# Allegro board Kati.brd
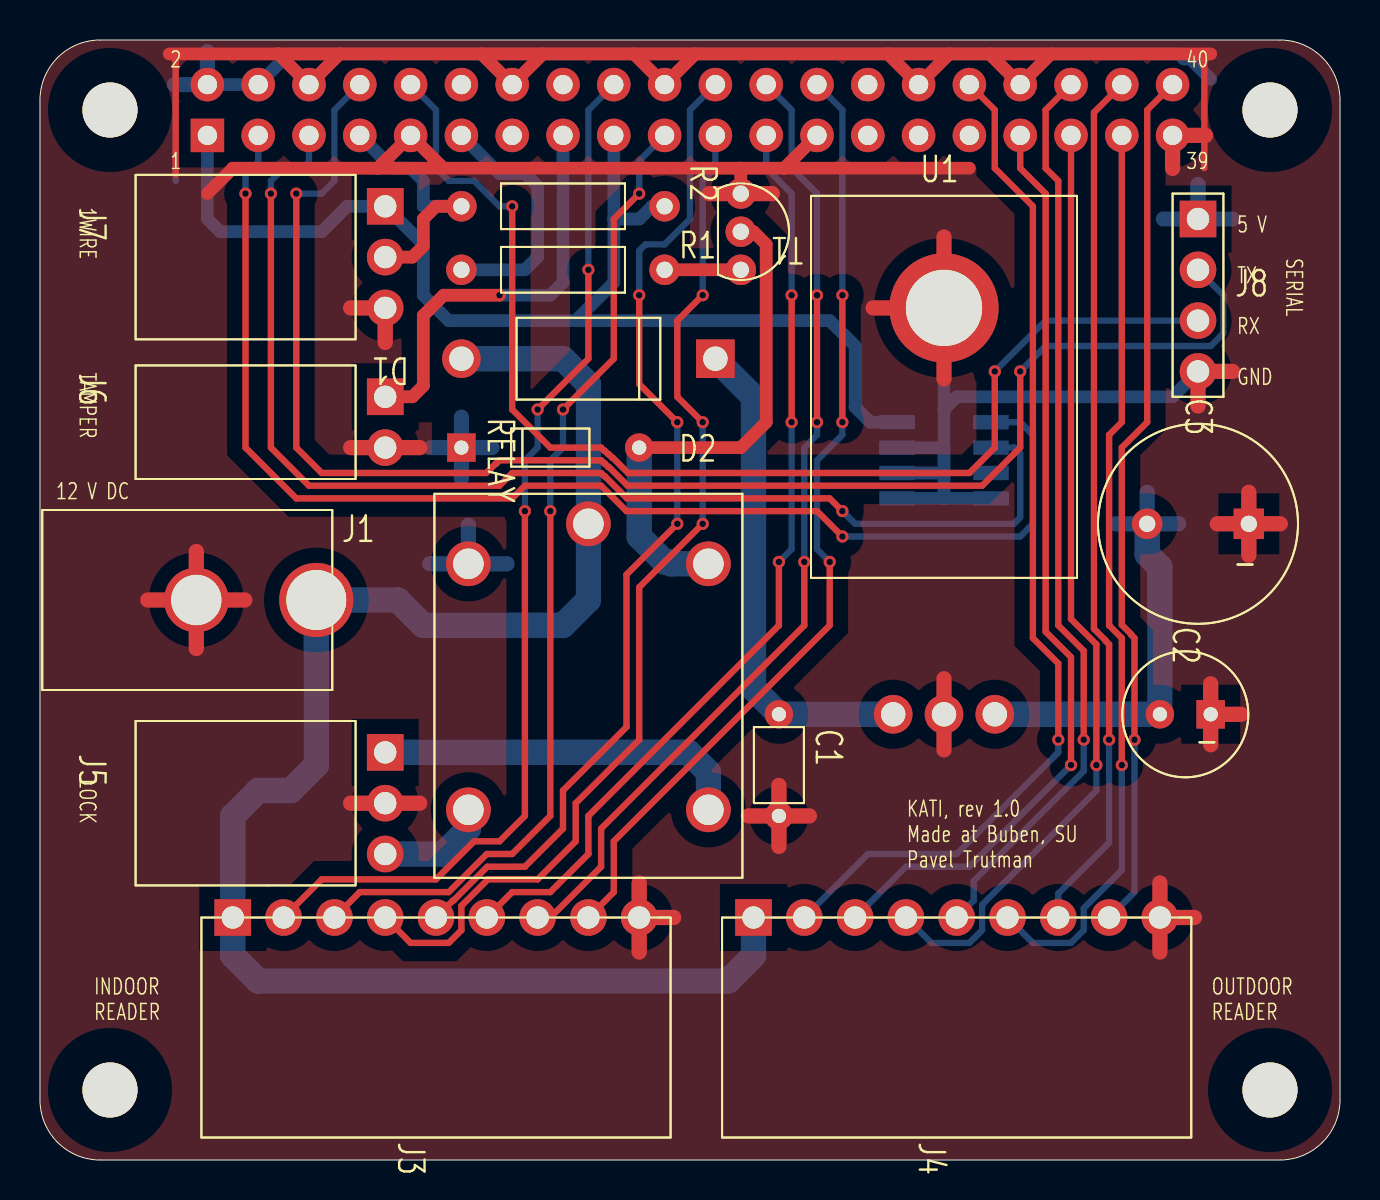
[diagram p0: board, top side]
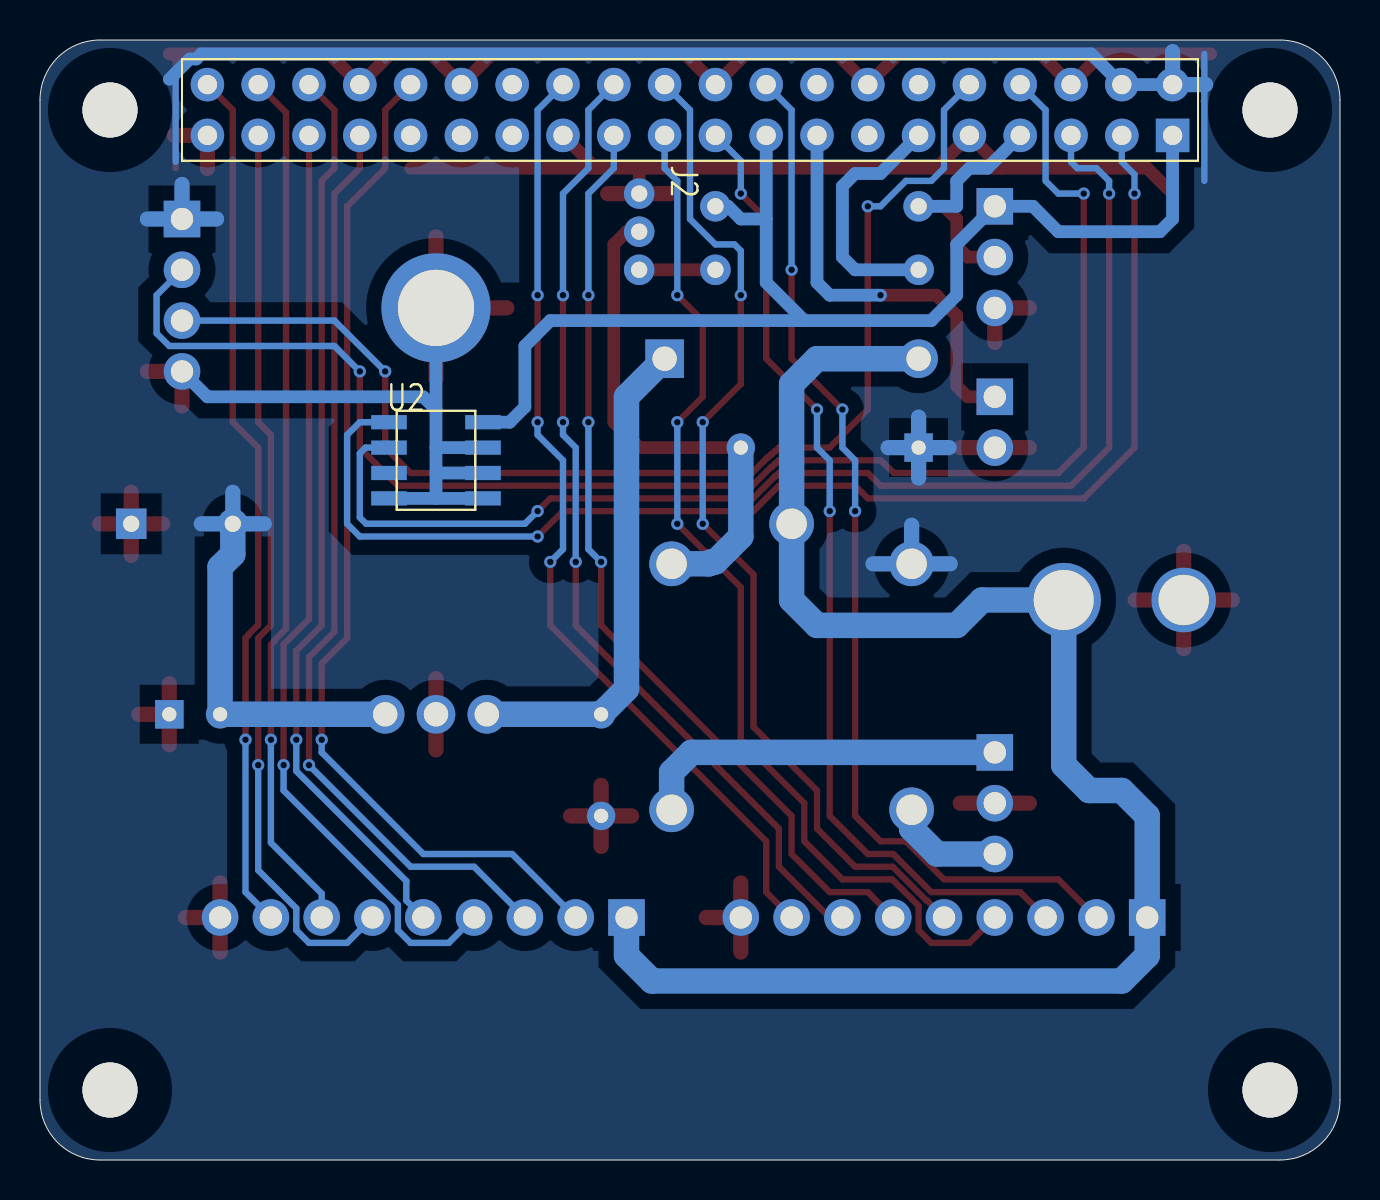
[diagram p1: board, bottom side, seen from below]

Outline 65 x 56 mm; copper layers: TOP, BOTTOM. Coordinates in mm from the lower left corner of the outline.
Outline path: 0,53 arc(0.88,55.12) 3,56 62,56 arc(64.12,55.12) 65,53 65,3 arc(64.12,0.88) 62,0 3,0 arc(0.88,0.88) 0,3 0,53

## Placement (name value [footprint] x y rotation side)
C1  100 nF  [KATI_C508]  36.95 19.74 270 top
C2  22 uF  [KATI_C63RAD]  57.27 22.29 0 top
C3  1000 uF  [KATI_C100RAD]  57.9 31.81 0 top
D1  BY299  [KATI_DO201]  27.42 40.06 180 top
D2  1N4148  [KATI_DO35]  25.52 35.62 0 top
J1  DC 7-16 V  [KATI_DS214B]  0.12 28 0 top
J2  Header 2x20 to RPi  [KATI_HEADER40_BOTTOM]  32.5 52.5 270 bottom
J3  Header to Indoor reader  [KATI_CONN9]  19.8 12.12 0 top
J4  Header to Outdoor header  [KATI_CONN9]  45.84 12.12 0 top
J5  Header to Lock  [KATI_CONN3]  17.26 17.84 270 top
J6  Header to Tampering contact  [KATI_CONN2]  17.26 36.89 270 top
J7  Header with 1WIRE  [KATI_CONN3]  17.26 45.14 270 top
J8  Header with serial port  [KATI_HEADER4]  57.9 43.24 0 top
NOREF  -  [unnamed]  3.5 52.5 0 top
NOREF#2  -  [unnamed]  61.5 3.5 0 top
NOREF#3  -  [unnamed]  61.5 52.5 0 top
NOREF#4  -  [unnamed]  3.5 3.5 0 top
R1  R  [KATI_RES]  26.15 44.51 0 top
R2  4k7  [KATI_RES]  26.15 47.69 0 top
RELAY  RAS-0515  [KATI_RELAY]  27.42 31.81 0 top
T1  BC369-030  [KATI_TO92]  35.04 47.69 0 top
U1  L4940V5  [KATI_TO220_HS]  45.2 42.61 0 top
U2  LM75A  [KATI_SO8]  45.2 34.98 180 bottom

## Library data of the parts
C1 = CAP NP
C2 C3 = CAP POL_0
D1 D2 = DIODE
J1 = CONNECTOR TWINAX-J
J2 = HEADER 20X2
J3 J4 = HEADER 9
J5 J7 = HEADER 3
J6 = HEADER 2
J8 = HEADER 4
R1 R2 = R
RELAY = RELAY SPDT
T1 = PNP BCE_0
U1 = 78XX/SM_5
U2 = TMP01_0

## Footprints (pads in the part's own frame, mm; a bottom-side part is the same pattern mirrored in y, then rotated)
KATI_C63RAD
  round 1.422 hole 0.711: 1(-1.27,0)
  rect 1.422x1.422 hole 0.711: 2(1.27,0)
KATI_C100RAD
  round 1.524 hole 0.813: 1(-2.54,0)
  rect 1.524x1.524 hole 0.813: 2(2.54,0)
KATI_C508
  round 1.422 hole 0.711: 1(-2.54,0) 2(2.54,0)
KATI_CONN2
  rect 1.829x1.829 hole 1.118: 1(-1.27,0)
  round 1.829 hole 1.118: 2(1.27,0)
KATI_CONN3
  rect 1.829x1.829 hole 1.118: 1(-2.54,0)
  round 1.829 hole 1.118: 2(0,0) 3(2.54,0)
KATI_CONN9
  rect 1.829x1.829 hole 1.118: 1(-10.16,0)
  round 1.829 hole 1.118: 2(-7.62,0) 3(-5.08,0) 4(-2.54,0) 5(0,0) 6(2.54,0) 7(5.08,0) 8(7.62,0) 9(10.16,0)
KATI_DO35
  rect 1.422x1.422 hole 0.711: 1(-4.445,0)
  round 1.422 hole 0.711: 2(4.445,0)
KATI_DO201
  rect 1.93x1.93 hole 1.219: 1(-6.35,0)
  round 1.93 hole 1.219: 2(6.35,0)
KATI_DS214B
  round 3.226 hole 2.515: 1(7.7,0)
  round 3.708 hole 2.997: 2(13.7,0)
KATI_HEADER4
  rect 1.829x1.829 hole 1.118: 1(0,3.81)
  round 1.829 hole 1.118: 2(0,1.27) 3(0,-1.27) 4(0,-3.81)
KATI_HEADER40_BOTTOM
  rect 1.676x1.676 hole 0.965: 1(1.27,24.13)
  round 1.676 hole 0.965: 2(-1.27,24.13) 3(1.27,21.59) 4(-1.27,21.59) 5(1.27,19.05) 6(-1.27,19.05) 7(1.27,16.51) 8(-1.27,16.51) 9(1.27,13.97) 10(-1.27,13.97) 11(1.27,11.43) 12(-1.27,11.43) 13(1.27,8.89) 14(-1.27,8.89) 15(1.27,6.35) 16(-1.27,6.35) 17(1.27,3.81) 18(-1.27,3.81) 19(1.27,1.27) 20(-1.27,1.27) 21(1.27,-1.27) 22(-1.27,-1.27) 23(1.27,-3.81) 24(-1.27,-3.81) 25(1.27,-6.35) 26(-1.27,-6.35) 27(1.27,-8.89) 28(-1.27,-8.89) 29(1.27,-11.43) 30(-1.27,-11.43) 31(1.27,-13.97) 32(-1.27,-13.97) 33(1.27,-16.51) 34(-1.27,-16.51) 35(1.27,-19.05) 36(-1.27,-19.05) 37(1.27,-21.59) 38(-1.27,-21.59) 39(1.27,-24.13) 40(-1.27,-24.13)
KATI_RELAY
  round 2.235 hole 1.524: 1(-6,-2) 2(6,-2) 3(0,0) 4(-6,-14.3) 5(6,-14.3)
KATI_RES
  round 1.524 hole 0.813: 1(-5.08,0) 2(5.08,0)
KATI_SO8
  rect 1.778x0.711 smd: 1(-2.349,1.905) 2(-2.349,0.635) 3(-2.349,-0.635) 4(-2.349,-1.905) 5(2.349,-1.905) 6(2.349,-0.635) 7(2.349,0.635) 8(2.349,1.905)
KATI_TO92
  round 1.524 hole 0.813: 1(0,0.635) 2(0,-1.27) 3(0,-3.175)
KATI_TO220_HS
  round 1.93 hole 1.219: 1(-2.54,-20.32) 2(0,-20.32) 3(2.54,-20.32)
  round 5.461 hole 3.81: 4(0,0)
unnamed
  round 2.75 hole 2.75 unplated: (0,0)

## Nets
GND: C1.2 C2.2 C3.2 J1.1 J2.6 J2.9 J2.14 J2.20 J2.25 J2.30 J2.34 J2.39 J3.9 J4.9 J5.2 J6.2 J7.3 J8.4 T1.1(E) U1.2(GND#2) U1.4 U2.4(GND) U2.5(A2) U2.6(A1) U2.7(A0)
V3.3: J2.1 J2.17 J7.1 R2.2 U2.8(VCC)
VCC: C2.1 C3.1 D2.1(K) J2.2 J2.4 J8.1 RELAY.1(COIL1) U1.3(VOUT)
VIN: D1.2(A) J1.2 J3.1 J4.1 RELAY.3(COMMON)
1WIRE: J2.7 J7.2 R2.1
CR-IN-BEEP: J2.18 J3.2
CR-IN-DATA0: J2.21 J3.4
CR-IN-DATA1: J2.22 J3.5
CR-IN-GLED: J2.23 J3.6
CR-IN-HOLD: J2.19 J3.3
CR-IN-RLED: J2.24 J3.7
CR-IN-TAMPER: J2.26 J3.8
CR-OUT-BEEP: J2.32 J4.2
CR-OUT-DATA0: J2.35 J4.4
CR-OUT-DATA1: J2.36 J4.5
CR-OUT-GLED: J2.37 J4.6
CR-OUT-HOLD: J2.33 J4.3
CR-OUT-RLED: J2.38 J4.7
CR-OUT-TAMPER: J2.40 J4.8
I2C-SCL: J2.5 U2.2(SCL)
I2C-SDA: J2.3 U2.1(SDA)
LOCK: J2.11 R1.1
SERIAL-RD: J2.10 J8.3
SERIAL-TD: J2.8 J8.2
TAMPER: J2.15 J6.1
N00436: C1.1 D1.1(K) U1.1(VIN)
N02282: J5.1 RELAY.5(NC)
N02286: J5.3 RELAY.4(NO)
N02428: R1.2 T1.3(B)
N12530: D2.2(A) RELAY.2(COIL2) T1.2(C)

Pads without a net: J2 12 13 16 27 28 29 31; U2 3

## Via types
v1: diameter 0.61, hole 0.33, TOP to BOTTOM, 37 vias

## Routing (per net, layer and track width the routed paths; a pad name or vN(x,y) marks a point on that pad's centre or on a via; arc(x,y) is an arc through that point)
GND: length 236.6
  TOP w0.318: 6.78,49.27 6.78,54.99 6.46,55.3 ; 58.53,55.3 58.22,54.99 58.22,49.59
  TOP w0.635: 35.04,49.59 20.17,49.59 ; 35.04,49.59 37.21,49.59 ; 35.04,49.59 T1.1 ; 20.17,49.59 16.89,49.59 ; 20.17,49.59 J2.9 16.89,49.59 ; 46.47,49.59 37.21,49.59 ; 37.21,49.59 J2.25 ; 45.47,55.3 J2.30 42.39,55.3 ; 45.47,55.3 42.39,55.3 ; 45.47,55.3 47.48,55.3 ; 16.89,49.59 9.64,49.59 8.37,48.32 ; 29.7,55.3 J2.20 32.77,55.3 ; 29.7,55.3 32.77,55.3 ; 29.7,55.3 25.14,55.3 ; 14.98,55.3 J2.6 11.91,55.3 ; 14.98,55.3 22.07,55.3 ; 14.98,55.3 11.91,55.3 ; 11.91,55.3 6.46,55.3 ; 32.77,55.3 42.39,55.3 ; 25.14,55.3 J2.14 22.07,55.3 ; 25.14,55.3 22.07,55.3 ; 47.48,55.3 J2.34 50.55,55.3 ; 47.48,55.3 50.55,55.3 ; 50.55,55.3 58.53,55.3
  TOP w0.762: 56.63,49.58 J2.39 58.28,51.23 ; C1.2 38.47,17.2 ; C1.2 36.95,15.68 ; C1.2 35.42,17.2 ; C1.2 36.95,18.73 ; J4.9 56,13.85 ; J4.9 56,10.4 ; J4.9 57.72,12.12 ; 57.9,37.7 J8.4 59.63,39.43 ; 7.82,25.57 J1.1 ; J1.1 7.82,30.43 ; J1.1 5.39,28 ; J1.1 10.24,28 ; J3.9 31.69,12.12 ; J3.9 29.96,10.4 ; J3.9 29.96,13.85 ; 15.53,17.84 J5.2 18.99,17.84 ; 60.44,30.23 C3.2 ; C3.2 62.02,31.81 ; C3.2 58.86,31.81 ; C3.2 60.44,33.38 ; 36.62,48.32 T1.1 33.47,48.32 ; U1.4 45.2,46.15 ; U1.4 41.66,42.61 ; U1.4 45.2,39.06 ; 15.53,35.62 J6.2 18.99,35.62 ; 45.2,20.51 U1.2 45.2,24.06 ; 58.53,20.76 C2.2 ; C2.2 60.06,22.29 ; C2.2 58.53,23.81 ; 15.53,42.61 J7.3 17.26,40.88
  BOTTOM w0.635: 45.2,35.62 45.2,34.35 ; 45.2,35.62 U2.7 ; 45.2,35.62 45.2,37.52 ; 45.2,34.35 45.2,33.08 ; 45.2,34.35 U2.6 ; U2.5 45.2,33.08 ; 45.2,33.08 U2.4 ; 45.2,37.52 45.84,38.16 56.63,38.16 J8.4 ; 45.2,37.52 U1.4
V3.3: length 60
  BOTTOM w0.635: 26.79,41.97 28.69,43.88 28.69,47.05 ; 26.79,41.97 39.48,41.97 40.76,40.7 40.76,37.65 41.52,36.89 U2.8 ; 26.79,41.97 20.44,41.97 19.16,43.24 19.16,45.78 J7.1 15.36,47.69 14.09,46.41 9,46.41 8.37,47.05 J2.1 ; 28.69,47.05 29.96,47.05 30.59,47.69 R2.2 ; 28.69,47.05 J2.17
VCC: length 105.4
  BOTTOM w0.318: 58.22,54.35 58.22,49.91 ; 6.78,53.71 6.78,55.3 ; 6.78,53.71 6.72,53.77 ; 6.78,53.71 6.78,48.95
  BOTTOM w0.635: 58.53,54.03 58.22,54.35 57.52,55.05 57.19,55.05 56.94,55.3 12.45,55.3 J2.4 J2.2
  BOTTOM w0.762: J8.1 59.63,47.05 ; J8.1 56.17,47.05 ; J8.1 57.9,48.78 ; 19.55,35.62 D2.1 ; D2.1 22.59,35.62 ; D2.1 21.07,37.14 ; D2.1 21.07,34.1 ; RELAY.1 21.42,31.74 ; RELAY.1 19.49,29.81 ; RELAY.1 23.35,29.81 ; 8.37,55.42 J2.2 6.72,53.77 ; C3.1 55.36,33.38 ; C3.1 53.78,31.81 ; C3.1 56.94,31.81
  BOTTOM w1.27: U1.3 C2.1 56,29.65 55.36,30.29 C3.1
VIN: length 81.8
  BOTTOM w1.27: D1.2 26.15,40.06 27.42,38.8 RELAY.3 27.42,28 26.15,26.73 19.16,26.73 17.89,28 J1.2 13.82,19.74 12.55,18.48 10.91,18.48 9.64,17.2 J3.1 9.64,10.22 10.91,8.95 34.41,8.95 35.67,10.22 J4.1
1WIRE: length 13
  TOP w0.635: R2.1 19.8,47.69 19.16,47.05 19.16,45.69 18.62,45.14 J7.2
  BOTTOM w0.635: J2.7 17.63,49.59 18.53,49.59 19.16,48.95 19.16,47.69 R2.1
CR-IN-BEEP: length 52.6
  TOP w0.318: v1(27.42,44.51) 27.42,40.06 v1(24.88,37.52) ; J3.2 14.09,14.03 19.8,14.03 21.7,15.94 22.98,15.94 24.24,17.2 v1(24.24,32.45)
  BOTTOM w0.318: v1(24.88,37.52) 24.88,35.62 24.24,34.98 v1(24.24,32.45) ; v1(27.42,44.51) 27.42,52.5 J2.18
CR-IN-DATA0: length 52.1
  TOP w0.318: v1(33.13,31.81) 29.96,28.64 29.96,21.02 26.79,17.84 26.79,15.94 24.88,14.03 22.39,14.03 21.07,12.71 21.07,11.49 20.44,10.86 18.53,10.86 J3.4 ; v1(33.13,36.89) 31.86,38.16 31.86,41.97 v1(33.13,43.24)
  BOTTOM w0.318: v1(33.13,36.89) v1(33.13,31.81) ; v1(33.13,43.24) 33.13,48.95 33.77,49.59 J2.21
CR-IN-DATA1: length 50.7
  TOP w0.318: v1(31.86,31.81) 29.32,29.27 29.32,21.65 26.15,18.48 26.15,16.57 24.24,14.66 22.37,14.66 20.67,12.97 20.65,12.97 J3.5 ; v1(31.86,36.89) 29.96,38.8 v1(29.96,43.24)
  BOTTOM w0.318: v1(29.96,43.24) 29.96,45.46 30.28,45.78 31.23,45.78 32.5,47.05 32.5,52.5 J2.22 ; v1(31.86,36.89) v1(31.86,31.81)
CR-IN-GLED: length 47.1
  TOP w0.318: v1(36.95,29.91) 36.95,26.73 27.42,17.2 27.42,15.3 25.52,13.39 23.61,13.39 J3.6 ; v1(37.58,36.89) v1(37.58,43.24)
  BOTTOM w0.318: v1(36.95,29.91) 37.58,30.54 v1(37.58,36.89) ; J2.23 36.31,49.59 37.58,48.32 v1(37.58,43.24)
CR-IN-HOLD: length 49.3
  TOP w0.318: v1(25.52,32.45) 25.52,17.2 23.61,15.3 22.34,15.3 20.44,13.39 15.99,13.39 J3.3 ; v1(29.96,48.32) 28.69,47.05 28.69,40.06 v1(26.15,37.52)
  BOTTOM w0.318: v1(29.96,48.32) 29.96,49.96 J2.19 ; v1(25.52,32.45) 25.52,34.98 26.15,35.62 v1(26.15,37.52)
CR-IN-RLED: length 48.9
  TOP w0.318: v1(38.85,36.89) v1(38.85,43.24) ; v1(38.22,29.91) 38.22,26.73 28.05,16.57 28.05,14.66 25.52,12.12 J3.7
  BOTTOM w0.318: v1(38.85,36.89) 38.85,36.26 38.22,35.62 v1(38.22,29.91) ; J2.24 37.58,52.5 37.58,49.59 38.85,48.32 v1(38.85,43.24)
CR-IN-TAMPER: length 48
  TOP w0.318: J3.8 28.69,13.39 28.69,15.93 39.48,26.73 v1(39.48,29.91) ; v1(40.12,36.89) v1(40.12,43.24)
  BOTTOM w0.318: v1(39.48,29.91) 38.85,30.54 38.85,34.98 40.12,36.26 v1(40.12,36.89) ; v1(40.12,43.24) 40.12,52.5 J2.26
CR-OUT-BEEP: length 51.4
  TOP w0.318: v1(50.91,21.02) 50.91,24.83 49.64,26.1 49.64,47.68 47.74,49.59 47.74,52.5 J2.32
  BOTTOM w0.318: v1(50.91,21.02) 50.91,20.38 45.84,15.3 41.39,15.3 J4.2
CR-OUT-DATA0: length 47.2
  TOP w0.318: J2.35 51.55,27.05 52.82,25.78 v1(52.82,19.74)
  BOTTOM w0.318: v1(52.82,19.74) 52.82,18.48 47.11,12.76 47.11,11.49 46.47,10.86 44.56,10.86 J4.4
CR-OUT-DATA1: length 45.6
  TOP w0.318: J2.36 50.28,52.5 50.28,49.59 50.91,48.96 50.91,26.73 52.19,25.46 v1(52.19,21.02)
  BOTTOM w0.318: v1(52.19,21.02) 52.19,19.45 46.68,13.95 46.68,12.97 J4.5
CR-OUT-GLED: length 45.7
  TOP w0.318: v1(54.09,19.74) 54.09,26.1 53.45,26.73 53.45,36.26 54.09,36.89 J2.37
  BOTTOM w0.318: v1(54.09,19.74) 54.09,14.49 52.19,12.58 52.19,11.49 51.55,10.86 49.64,10.86 J4.6
CR-OUT-HOLD: length 46.5
  TOP w0.318: J2.33 49.01,49.59 50.28,48.32 50.28,26.41 51.55,25.14 v1(51.55,19.74)
  BOTTOM w0.318: v1(51.55,19.74) 46.47,14.66 43.3,14.66 J4.3
CR-OUT-RLED: length 43.6
  TOP w0.318: J2.38 52.7,52.38 52.7,26.56 53.29,25.97 53.29,25.95 53.45,25.78 v1(53.45,21.02)
  BOTTOM w0.318: J4.7 50.91,13.33 53.45,15.87 v1(53.45,21.02)
CR-OUT-TAMPER: length 43.5
  TOP w0.318: J2.40 55.36,52.5 55.36,36.89 54.09,35.62 54.09,26.76 54.56,26.29 54.56,26.26 54.73,26.09 v1(54.73,21.02)
  BOTTOM w0.318: J4.8 54.73,13.39 v1(54.73,21.02)
I2C-SCL: length 61.4
  TOP w0.318: v1(40.12,32.45) 39.48,33.08 29.35,33.08 28.25,34.18 28.22,34.18 28.06,34.35 23.61,34.35 22.98,33.72 13.45,33.72 11.55,35.62 v1(11.55,48.32)
  BOTTOM w0.318: v1(40.12,32.45) 40.76,31.81 48.69,31.81 49.01,32.13 49.01,35.33 48.72,35.62 U2.2 ; J2.5 13.45,49.91 13.13,49.59 12.18,49.59 11.55,48.95 v1(11.55,48.32)
I2C-SDA: length 64.7
  TOP w0.318: v1(40.12,31.18) 38.85,32.45 29.32,32.45 28.05,33.72 24.24,33.72 23.61,33.08 12.81,33.08 10.27,35.62 v1(10.27,48.32)
  BOTTOM w0.318: v1(40.12,31.18) 49.01,31.18 49.64,31.81 49.64,36.25 49.01,36.89 U2.1 ; J2.3 10.91,49.91 10.27,49.27 v1(10.27,48.32)
LOCK: length 12.5
  BOTTOM w0.635: J2.11 22.98,49.33 24.24,49.33 24.88,48.69 24.88,45.14 24.24,44.51 R1.1
SERIAL-RD: length 60.5
  TOP w0.318: v1(47.74,39.43) 47.74,35.62 46.47,34.35 29.4,34.35 28.64,35.12 28.61,35.12 28.44,35.28 28.42,35.28 28.25,35.45 28.22,35.45 28.05,35.62 25.52,35.62 23.61,37.53 v1(23.61,47.69)
  BOTTOM w0.318: J2.10 19.8,52.5 19.8,49.59 20.44,48.95 21.7,48.95 22.98,47.69 v1(23.61,47.69) ; v1(47.74,39.43) 50.28,41.97 J8.3
SERIAL-TD: length 77
  TOP w0.318: v1(12.82,48.32) 12.82,35.62 14.08,34.35 22.31,34.35 22.78,34.82 22.81,34.82 22.98,34.98 28.05,34.98 28.22,34.82 28.25,34.82 28.42,34.65 28.44,34.65 29.38,33.72 47.11,33.72 49.01,35.62 v1(49.01,39.43)
  BOTTOM w0.318: v1(49.01,39.43) 50.28,40.7 58.53,40.7 59.17,41.34 59.17,43.24 J8.2 ; v1(12.82,48.32) 14.08,48.32 14.72,48.96 14.72,52.5 J2.8
TAMPER: length 20.7
  TOP w0.635: v1(22.98,43.24) 20.18,43.24 19.16,42.22 19.16,38.71 18.62,38.16 J6.1
  BOTTOM w0.635: J2.15 26.15,43.88 25.52,43.24 v1(22.98,43.24)
N00436: length 24.8
  BOTTOM w1.27: U1.1 C1.1 35.67,23.55 35.67,38.16 D1.1
N02282: length 18.4
  BOTTOM w1.27: J5.1 32.43,20.38 33.42,19.39 RELAY.5
N02286: length 5.6
  BOTTOM w1.27: J5.3 20.15,15.3 21.42,16.57 RELAY.4
N02428: length 3.8
  TOP w0.635: R1.2 T1.3
N12530: length 25.8
  TOP w0.635: D2.2 35.04,35.62 36.31,36.89 36.31,45.78 35.67,46.41 T1.2
  BOTTOM w1.27: D2.2 29.96,31.18 31.23,29.91 31.45,29.91 31.54,29.81 RELAY.2

## Copper pours and planes (outline as drawn; the poured copper is in the pictures)
GND on TOP: 3,0 0.88,0.88 0,3 0,53 0.88,55.12 3,56 62,56 64.12,55.12 65,53 65,3 64.12,0.88 62,0 ; 16 cut-outs
VCC on BOTTOM: 2.7,0 2.7,0.02 0.78,0.99 0,3 0,53 0.78,55.01 2.7,55.98 2.7,56 62.3,56 62.3,55.98 64.22,55.01 65,53 65,3 64.12,0.88 62,0 ; 23 cut-outs

## Text on the board
Ref Des/Silkscreen Top: 12 V DC | INDOOR | READER | 2 | 1 | KATI, rev 1.0 | Made at Buben, SU | Pavel Trutman | 40 | 39 | OUTDOOR | 5 V | TX | RX | GND | 1WIRE | TAMPER | LOCK | SERIAL
